# Altium PCB BOARD.PcbDoc
Units mm, origin at the board's own origin, x right, y up, seen from the top; angles counter-clockwise.
Board outline 34 x 30 mm, 2 copper layers (Top Layer, Bottom Layer), stack 0.46 mm thick; 43 components, 30 nets, 148 pads, 132 vias.
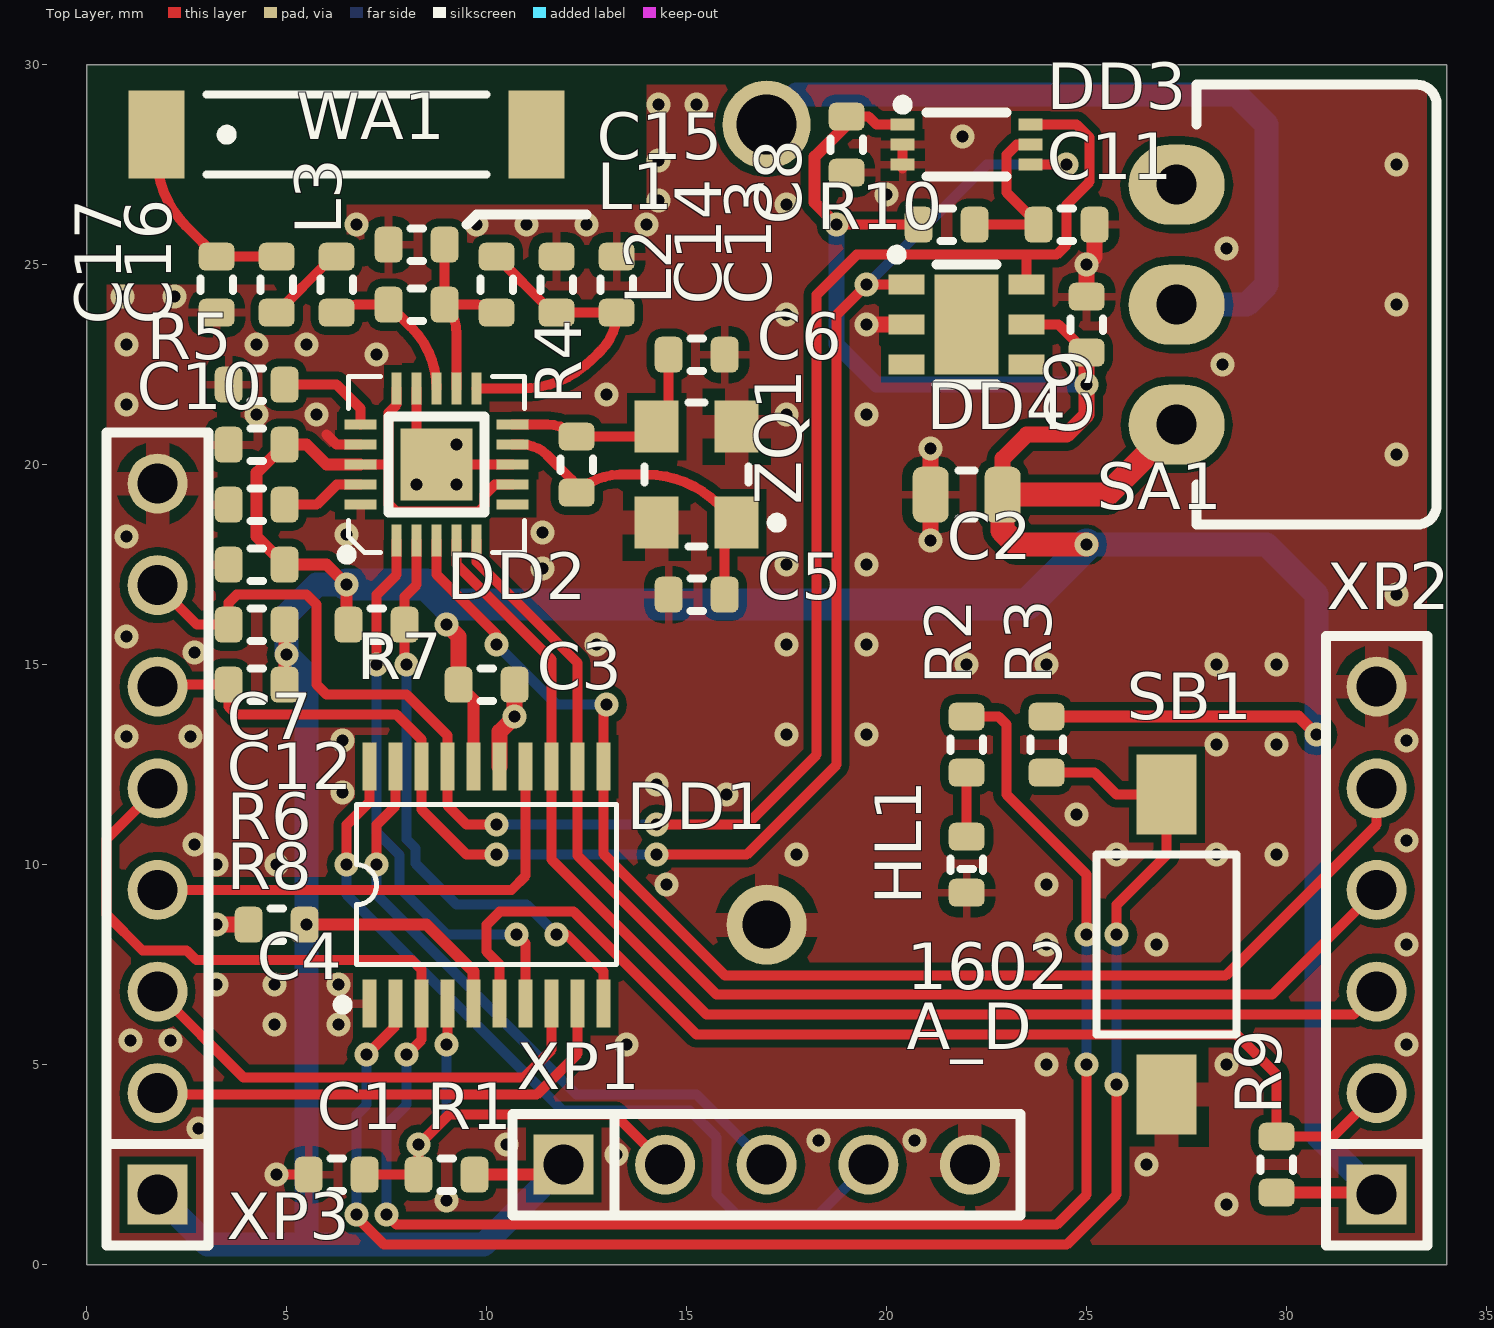
[diagram p0: Top Layer view]
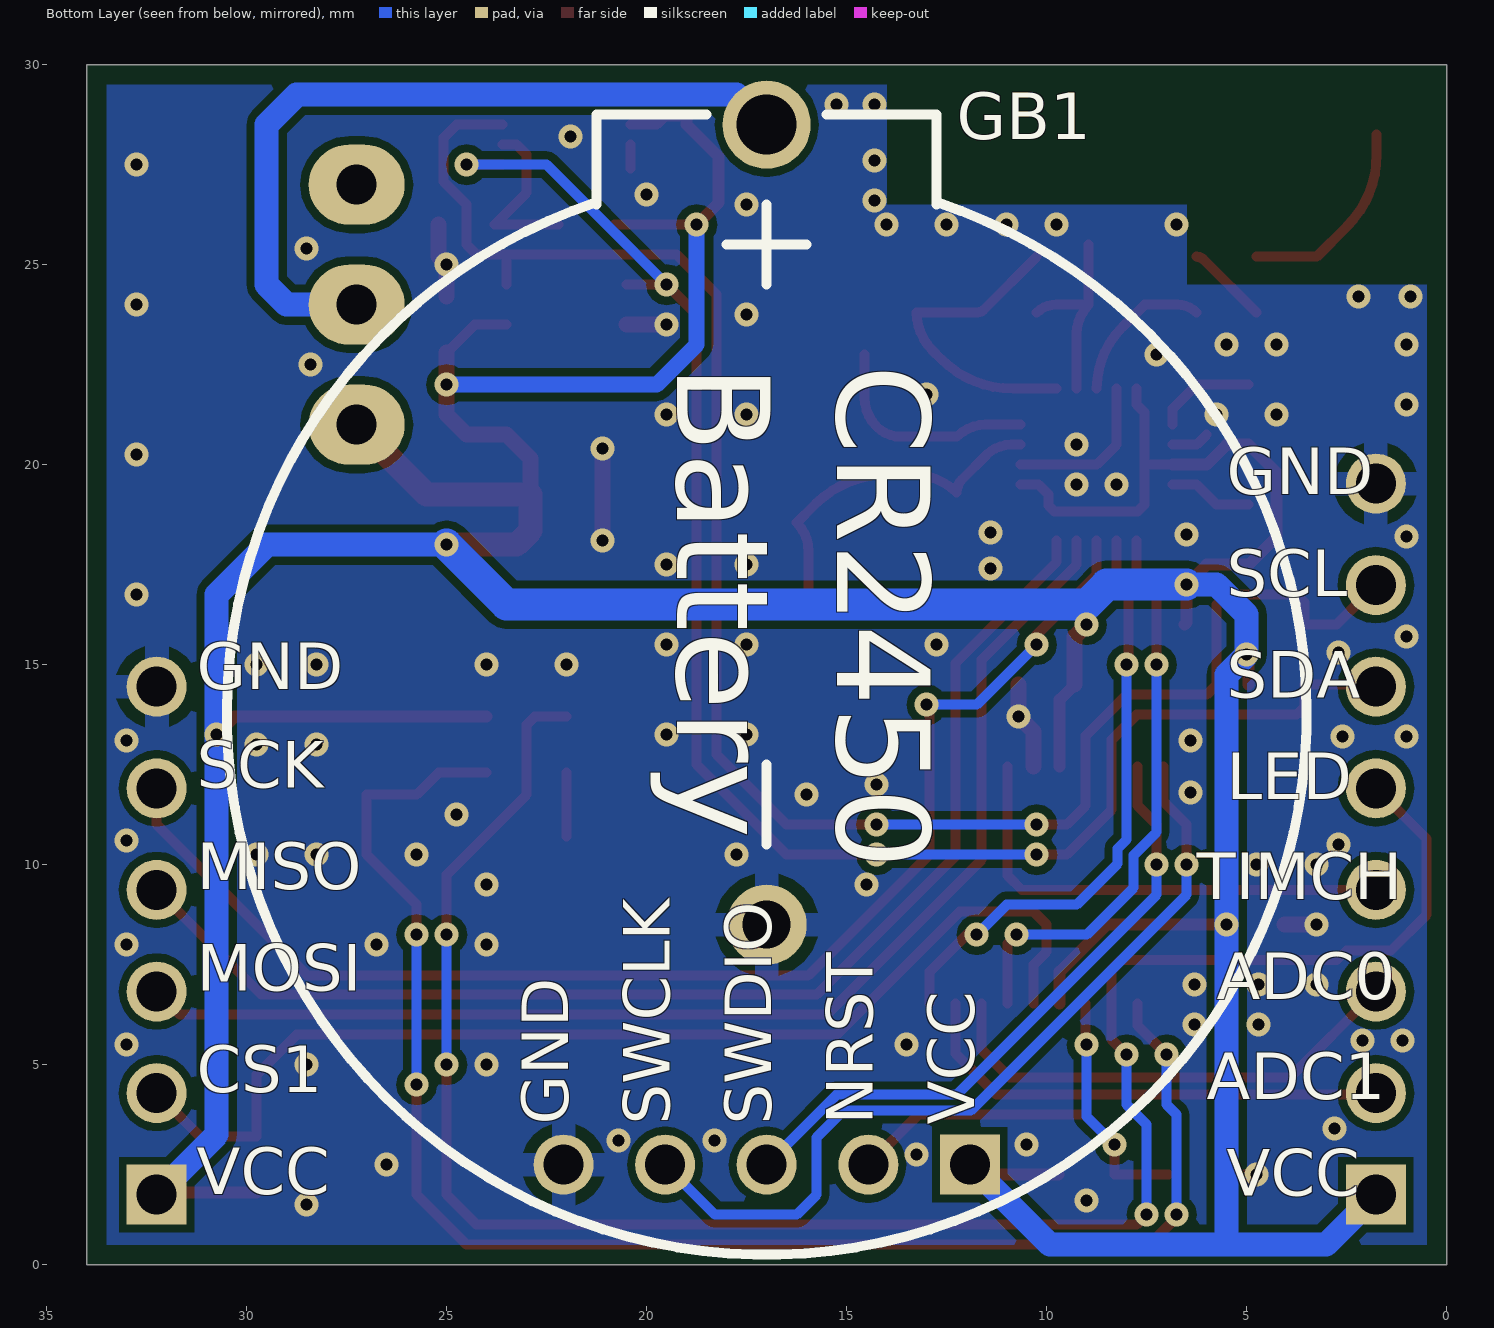
[diagram p1: Bottom Layer view, seen from below]
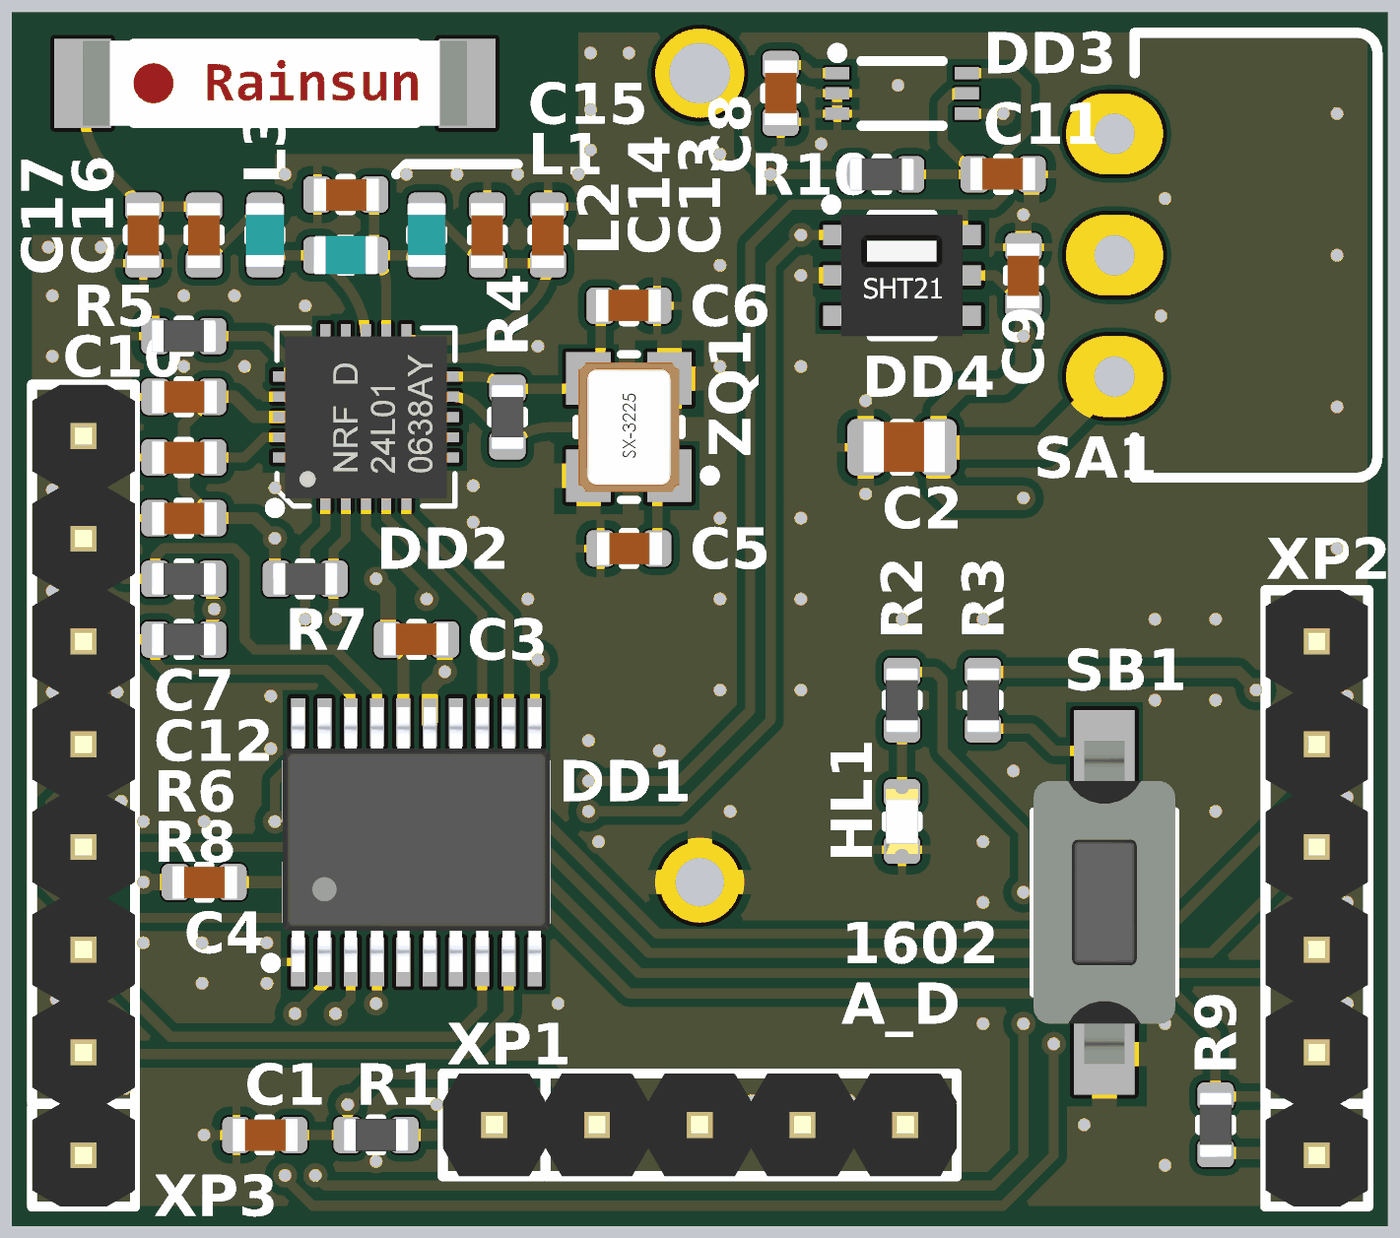
[diagram p2: 3D render of the assembled board from above, using the file's embedded part models]

## Layer stack, top to bottom
Top Solder: solder mask 0.01, Solder Resist, Dk 3.5
Top Layer: signal copper 0.03
Dielectric1: core 0.4, FR-4, Dk 4.2
Bottom Layer: signal copper 0.03
Bottom Solder: solder mask 0.01, Solder Resist, Dk 3.5

## Board outline
0,0 34,0 34,30 0,30

## Design rules (kind name [scope] priority, off if disabled: settings)
Clearance Clearance_ANT [InNetClass('ANT_Class') vs InPolygon] p1: gap=0.6 ignorepadtopadclearanceinfootprint=FALSE except(0: Arc-Hole Track-Hole SMDPad-Hole THPad-Hole Via-Hole Fill-Hole Poly-Hole Region-Hole Text-Hole)
Clearance Clearance_GND_Poly [(InNet('GND') AND InPolygon )] p2: gap=0.2 ignorepadtopadclearanceinfootprint=FALSE except(0: Arc-Hole Track-Hole SMDPad-Hole THPad-Hole Via-Hole Fill-Hole Poly-Hole Region-Hole Text-Hole)
Clearance [All] p3: gap=0.15 ignorepadtopadclearanceinfootprint=FALSE except(0: Arc-Hole Track-Hole SMDPad-Hole THPad-Hole Via-Hole Fill-Hole Poly-Hole Region-Hole Text-Hole)
ComponentClearance [All] p1 off: gap=0.25 collisioncheckmode=3 verticalgap=0.25 showdistances=FALSE
DiffPairsRouting [All] p1: maxlimit=0.4 minlimit=0.15 mostfreqgap=0.25 toplayer_minwidth=0.2 toplayer_maxwidth=0.4 toplayer_prefwidth=0.25 bottomlayer_minwidth=0.2 bottomlayer_maxwidth=0.4 bottomlayer_prefwidth=0.25 maxuncoupledlength=12
Height [All] p1: minheight=0 maxheight=25 prefheight=25
HoleSize [All] p1: absolutevalues=TRUE maxlimit=6 minlimit=0.3 maxpercent=80.000 minpercent=20.000
HoleToHoleClearance [All] p1: gap=0.25 allowstackedmicrovias=TRUE
MinimumSolderMaskSliver [All] p1 off: minsoldermaskwidth=0.254
PlaneClearance [All] p1: clearance=0.5
PlaneConnect [All] p1: planeconnectstyle=Relief reliefexpansion=0.5 reliefentries=4 reliefconductorwidth=0.25 reliefairgap=0.25
PolygonConnect PolygonConnect_XW1 [InComponent('XW1') vs IsPolygon] p1: connectstyle=Direct reliefconductorwidth=0.254 reliefentries=4 polygonreliefangle="90 Angle" airgapwidth=0.254
PolygonConnect PolygonConnect_Components [InComponent('C*') OR InComponent('R*') OR InComponent('NR*') OR InComponent('DA*') OR InComponent('DD*') OR InComponent('HL*')] p2: connectstyle=Relief reliefconductorwidth=0.2 reliefentries=4 polygonreliefangle="90 Angle" airgapwidth=0.25
PolygonConnect PolygonConnect_Connectors [All vs (InPadClass('All Pads'))] p3: connectstyle=Relief reliefconductorwidth=0.6 reliefentries=4 polygonreliefangle="90 Angle" airgapwidth=0.3
PolygonConnect PolygonConnect_Via [All] p4: connectstyle=Direct reliefconductorwidth=0.254 reliefentries=4 polygonreliefangle="90 Angle" airgapwidth=0.254
RoutingCorners [All] p1: cornerstyle=45-Degree minsetback=1.5 maxsetback=3.5
RoutingVias [All] p1: holewidth=0.6 width=1.2 viastyle="Through Hole" minholewidth=0.3 minwidth=0.6 maxholewidth=1 maxwidth=2
SMDEntry [All] p1: side=TRUE corner=TRUE anyangle=TRUE
SilkToSilkClearance [All] p1 off: silktosilkclearance=0.254
SilkToSolderMaskClearance [IsPad] p1 off: minsilkscreentomaskgap=0.254 clearancetoexposedcopper=TRUE
SolderMaskExpansion [All] p1: expansion=0.1
Width [All] p1: maxlimit=8 minlimit=0.2 preferedwidth=0.6
Width Width_TrackEnds [All] p2 off: maxlimit=0.25 minlimit=0.25 preferedwidth=0.25 checkconnectedcopper=TRUE
19 further rules are at their usual default settings.

## Components (designator, comment, footprint, x,y, rotation, side; value= is the part's Value field where it differs from the comment)
C1 "Capacitor" C0603_L 6.25,2.25 r0 top
C2 "Capacitor" C0805_L 22,19.25 r0 top
C3 "Capacitor" C0603_L 10,14.5 r180 top
C4 "Capacitor" C0603_L 4.75,8.5 r0 top
C5 "Capacitor" C0603_L 15.25,16.75 r0 top
C6 "Capacitor" C0603_L 15.25,22.75 r180 top
C7 "Capacitor" C0603_L 4.25,19 r0 top
C8 "Capacitor" C0603_L 19,28 r90 top
C9 "Capacitor" C0603_L 25,23.5 r270 top
C10 "Capacitor" C0603_L 4.25,20.5 r0 top
C11 "Capacitor" C0603_L 24.5,26 r180 top
C12 "Capacitor" C0603_L 4.25,17.5 r0 top
C13 "Capacitor" C0603_L 13.25,24.5 r270 top
C14 "Capacitor" C0603_L 11.75,24.5 r270 top
C15 "Capacitor" C0603_L 8.25,25.5 r0 top
C16 "Capacitor" C0603_L 4.75,24.5 r270 top
C17 "Capacitor" C0603_L 3.25,24.5 r270 top
DD1 "STM32F030Fx_20p" TSSOP-20W 10,9.5 r0 top
DD2 "nRF24L01" QFN-20-NRF24L01 8.75,20 r90 top
DD3 "BH1750" WSOF-6I 22,28 r270 top
DD4 "Si7021" DFN-6-PC 22,23.5 r270 top
GB1 "Text" BS-2450 17,15 r270 bottom
HL1 "Text" LD0603_L 22,10 r270 top
L1 "Coil" L0603_L 8.25,24 r0 top
L2 "Coil" L0603_L 10.25,24.5 r90 top
L3 "Coil" L0603_L 6.25,24.5 r90 top
R1 "Resistor" R0603_L 9,2.25 r0 top
R2 "Resistor" R0603_L 22,13 r90 top
R3 "Resistor" R0603_L 24,13 r90 top
R4 "Resistor" R0603_L 12.25,20 r90 top
R5 "Resistor" R0603_L 4.25,22 r0 top
R6 "Resistor" R0603_L 4.25,16 r0 top
R7 "Resistor" R0603_L 7.25,16 r180 top
R8 "Resistor" R0603_L 4.25,14.5 r0 top
R9 "Resistor" R0603_L 29.75,2.5 r270 top
R10 "Resistor" R0603_L 21.5,26 r180 top
SA1 "POWER" SS-12F21 27.25,24 r90 top
SB1 "CONF RST" DTSM-32 27,8 r180 top
WA1 "Antenna_US_1p" AN9520 6.5,28.25 r0 top
XP1 "SWD" PLS-5 17,2.5 r0 top
XP2 "SPI" PLS-6 32.25,8.1 r90 top locked
XP3 "IO" PLS-8 1.77,10.64 r90 top locked
ZQ1 "Crystal" SX-3225 15.25,19.75 r90 top

## Footprints (in the part's own frame and the unit in brackets; to place one, negate y for a bottom-side part, rotate by r counter-clockwise, add the part's x,y. Pads: shape width x height; smd on the part's side, far side on the other; paste and mask are expansions set on the pad)
AN9520 [mm] "Rainsun"
  rect 1.4x2.2 smd: 1(-4.75,0) 2(4.75,0)
  silkscreen extent -3.5,-1 3.5,1, body extent -4.75,-1.05 4.75,1.05, height 1.07
BS-2450 [mm]
  round 2.2 hole 1.5: 1(-13.5,0)
  round 2 hole 1.2: 2(6.5,0)
  silkscreen extent -13.75,-13.5 14.75,13.5, body extent -12.25,-13.5 14.75,13.5, height 9.91
C0603_L [mm] "Chip Capacitor; Body 1.6 x 0.8 mm (LxW typ)"
  rrect50% 0.7x0.9 smd mask+0.05: 1(-0.7,0) 2(0.7,0)
  silkscreen extent -0.15,-0.41 0.15,0.41, body extent -0.79,-0.41 0.81,0.39, height 0.8
C0805_L [mm] "Chip Capacitor; Body 2.0 x 1.2 mm (LxW typ)"
  rrect50% 0.9x1.4 smd mask+0.07: 1(-0.9,0) 2(0.9,0)
  silkscreen extent -0.2,-0.6 0.2,0.6, body extent -0.95,-0.62 1.05,0.64, height 1.25
DFN-6-PC [mm]
  rect 0.5x0.9 smd: 1(-1,-1.5) 2(0,-1.5) 3(1,-1.5) 4(1,1.5) 5(0,1.5) 6(-1,1.5)
  rect 2.5x1.6 smd: 7(0,0)
  silkscreen extent -1.87,-1.87 1.5,0.75, body extent -1.5,-1.52 1.5,1.5, height 1.12
DTSM-32 [mm] "1 contact, Surface, 0.05A, 250V, H=5mm"
  rect 1.5x2 smd: 1(0,3.75) 2(0,-3.75)
  silkscreen extent -1.75,-2.25 1.75,2.25, body extent -1.75,-4 1.75,4, height 5.5
L0603_L [mm] "Chip Coil; Body 1.6 x 0.8 mm (LxW typ)"
  rrect50% 0.7x0.9 smd mask+0.05: 1(-0.7,0) 2(0.7,0)
  Top Layer pour cut-out: -0.5,0.45 0.5,0.45 0.5,-0.45 -0.5,-0.45
  silkscreen extent -0.15,-0.41 0.15,0.41, body extent -0.8,-0.47 0.8,0.48, height 0.8
LD0603_L [mm] "Chip Led; Body 1.6 x 0.8 mm (LxW typ)"
  rrect50% 0.7x0.9 smd mask+0.05: 1(-0.7,0) 2(0.7,0)
  silkscreen extent -0.15,-0.41 0.15,0.41, body extent -0.8,-0.4 0.8,0.4, height 0.7
PLS-5 [mm]
  rect 1.5x1.5 hole 1: 1(-5.08,0)
  round 1.5 hole 1: 2(-2.54,0) 3(0,0) 4(2.54,0) 5(5.08,0)
  silkscreen extent -6.35,-1.27 6.35,1.27, body extent -6.35,-1.27 6.35,1.27, height 8.9
PLS-6 [mm]
  rect 1.5x1.5 hole 1: 1(-6.35,0)
  round 1.5 hole 1: 2(-3.81,0) 3(-1.27,0) 4(1.27,0) 5(3.81,0) 6(6.35,0)
  silkscreen extent -7.62,-1.27 7.62,1.27, body extent -7.62,-1.27 7.62,1.27, height 8.9
PLS-8 [mm]
  rect 1.5x1.5 hole 1: 1(-8.89,0)
  round 1.5 hole 1: 2(-6.35,0) 3(-3.81,0) 4(-1.27,0) 5(1.27,0) 6(3.81,0) 7(6.35,0) 8(8.89,0)
  silkscreen extent -10.16,-1.27 10.16,1.27, body extent -10.16,-1.27 10.16,1.27, height 8.9
QFN-20-NRF24L01 [mm] "nrf24L01 \ nrf24L01+"
  rect 0.8x0.25 smd: 1(-1.9,1) 2(-1.9,0.5) 3(-1.9,0) 4(-1.9,-0.5) 5(-1.9,-1) 11(1.9,-1) 12(1.9,-0.5) 13(1.9,0) 14(1.9,0.5) 15(1.9,1)
  rect 0.25x0.8 smd: 6(-1,-1.9) 7(-0.5,-1.9) 8(0,-1.9) 9(0.5,-1.9) 10(1,-1.9) 16(1,1.9) 17(0.5,1.9) 18(0,1.9) 19(-0.5,1.9) 20(-1,1.9)
  rect 1.8x1.8 smd: 21(0,0)
  silkscreen extent -2.37,-2.2 2.2,2.37, body extent -2.02,-2.01 2,2.01, height 1.48
R0603_L [mm] "Chip Resistor; Body 1.6 x 0.8 mm (LxW typ)"
  rrect50% 0.7x0.9 smd mask+0.05: 1(-0.7,0) 2(0.7,0)
  silkscreen extent -0.15,-0.41 0.15,0.41, body extent -0.8,-0.4 0.8,0.4, height 0.38
SS-12F21 [mm]
  oval 2x2.4 hole 1: 1(0,0) 2(-3,0) 3(3,0)
  silkscreen extent -5.5,-6.5 5.5,-0.5
SX-3225 [mm]
  rect 1.3x1.1 smd: 1(-1.2,-1) 2(1.2,-1) 3(1.2,1) 4(-1.2,1)
  silkscreen extent -1.8,-2.1 1.8,1.3, body extent -1.6,-1.25 1.6,1.25, height 0.81
TSSOP-20W [mm]
  rect 0.35x1.2 smd: 1(-2.925,-2.975) 2(-2.275,-2.975) 3(-1.625,-2.975) 4(-0.975,-2.975) 5(-0.325,-2.975) 6(0.325,-2.975) 7(0.975,-2.975) 8(1.625,-2.975) 9(2.275,-2.975) 10(2.925,-2.975) 11(2.925,2.95) 12(2.275,2.95) 13(1.625,2.95) 14(0.975,2.95) 15(0.325,2.95) 16(-0.325,2.95) 17(-0.975,2.95) 18(-1.625,2.95) 19(-2.275,2.95) 20(-2.925,2.95)
  silkscreen extent -3.72,-3.12 3.25,2, body extent -3.3,-3.22 3.3,3.33, height 1.2
WSOF-6I [mm]
  rect 0.3x0.6 smd mask+0.06: 1(-0.5,-1.6) 2(0,-1.6) 3(0.5,-1.6) 4(0.5,1.6) 5(0,1.6) 6(-0.5,1.6)
  silkscreen extent -1.12,-1.72 0.8,1, body extent -0.8,-1.3 0.8,1.3, height 0.75

## Part data
C1 C3 C4 C8 C9 C11: library part GRM188R71C104KA01D
C2: library part C0805C476M9PAC
C5 C6: library part GRM1885C1H120JA01D
C7: library part GRM188R71E223KA01D
C10: library part C0603C103J5RAC
C12: library part C0603C102J5GAC
C13: library part C0603C222J5GAC
C14: library part C0603C479K5GAC
C15 C16 C17: library part C0603C229C5GAC
DD1: library part STM32F030F4P6
DD2: library part nRF24L01+, "Single Chip 2.4GHz Transceiver"
DD3: library part BH1750FVI
DD4: library part Si7021-A20-GM1
GB1: library part BS-2450
HL1: library part BL-LS0603GC
L1: library part LQG18HN8N2J00
L2: library part LQG18HN2N7S00
L3: library part LQG18HN3N9S00
R1 R3 R6 R7 R8 R9: library part RC0603JR-0710KL
R2 R10: library part RC0603JR-071KL
R4: library part RC0603JR-071ML
R5: library part RC0603JR-0722KL
SA1: library part SS-12F21
SB1: library part DTSM-32
WA1: library part AN9520
XP1: library part PLS-5
XP2: library part PLS-6
XP3: library part PLS-8
ZQ1: library part "SX-3225 16.000MHz"

## Via types
v1: diameter 0.6, hole 0.3, Top Layer to Bottom Layer, tented both sides, 132 vias

## Nets (pads, with @x,y where several pads share a name; then routed paths per layer and width w, separated by ;. In a path a pad name is that pad's centre, name@x,y a point inside that pad or via, vN(x,y) a via of type N, cw(c..) or ccw(c..) an arc to the next point about the centre after c; other vN are vias at no path point)
ADC0: DD1.8 XP3.3 | length 12.2
  Top Layer w0.25: XP3.3 3.925,4.675 10.925,4.675 11.625,5.375 DD1.8
ADC1: DD1.9 XP3.2 | length 12.2
  Top Layer w0.25: XP3.2 1.81,4.25 11.25,4.25 12.275,5.275 DD1.9
ANT: C16.1 C17.1 WA1.1 | length 5.1
  Top Layer w0.25: WA1.1 1.75,27.752 ccw(c4.29,27.752) 2.494,25.956 C17.1 C16.1
BTN: DD1.2 R3.1 SB1.2 | length 39.3
  Top Layer w0.25: v1(6.75,1.25) 6.75,1.187 7.437,0.5 24.5,0.5 25.75,1.75 v1(25.75,4.5) ; v1(7,5.25) 7.725,5.975 DD1.2 ; R3.1 25.2,12.3 25.75,11.75 SB1.2 27,10.25 25.75,9 v1(25.75,8.25)
  Bottom Layer w0.25: v1(6.75,1.25) 6.75,3.75 7,4 v1(7,5.25) ; v1(25.75,4.5) v1(25.75,8.25)
GND: C1.1 C2.1 C3.1 C4.1 C5.1 C6.1 C7.1 C8.1 C9.1 C10.1 C11.1 C12.1 C13.1 C14.1 C15.1 C17.2 DD1.1 DD1.15 DD2.8 DD2.14 DD2.17 DD2.20 DD2.21 DD3.2 DD3.3 DD4.2 GB1.2 HL1.2 R5.1 SB1.1 XP1.5 XP2.6 XP3.8 ZQ1.2 ZQ1.4 | length 14.5
  Top Layer w0.25: v1(4.75,2.25) C1.1 ; 6,20.75 6.25,20.5 DD2.17 ; DD2.14 8.25,20.5 DD2.21 DD2.8 ; DD3.3@20.4,27.4 DD3.3 DD3.2
  Top Layer w0.4: v1(3.25,8.5) C4.1 ; DD1.15 10.325,13.325 v1(10.7,13.7) C3.1 ; v1(19.5,23.5) DD4.2 ; v1(21.1,18.1) C2.1 v1(21.1,20.4) ; C9.1 v1(25,25) 25.2,25.2 C11.1
  other v1: 28.5,1.5 9,1.6 26.5,2.5 13.25,2.75 10.5,3 18.3,3.1 20.7,3.1 2.8,3.4 24,5 28.5,5 13.5,5.5 33,5.5 1.1,5.6 2.1,5.6 4.7,6 6.3,6 3.25,7 4.7,7 6.3,7 24,8 26.75,8 33,8 14.5,9.5 24,9.5 3.25,10 4.75,10 17.75,10.25 25.75,10.25 28.25,10.25 29.75,10.25 2.7,10.5 33,10.6 24.75,11.25 16,11.75 6.4,11.8 14.25,12 28.25,13 29.75,13 6.4,13.1 33,13.1 1,13.2 2.6,13.2 17.5,13.25 19.5,13.25 22,15 24,15 28.25,15 29.75,15 2.7,15.3 12.75,15.5 17.5,15.5 19.5,15.5 1,15.7 32.75,16.75 11.4,17.4 17.5,17.5 19.5,17.5 1,18.2 6.5,18.25 11.4,18.3 8.25,19.5 9.25,19.5 32.75,20.25 9.25,20.5 4.25,21.25 5.75,21.25 17.5,21.25 19.5,21.25 1,21.5 13,21.75 28.4,22.5 7.25,22.75 1,23 4.25,23 5.5,23 17.5,23.75 32.75,24 0.9,24.2 2.2,24.2 28.5,25.4 6.75,26 9.75,26 11,26 12.5,26 14,26 17.5,26.5 14.3,26.6 20,26.75 32.75,27.5 14.3,27.6 21.9,28.2 14.3,29 15.25,29
I2C_SCL: DD1.17 DD3.6 DD4.6 R6.1 XP3.7 | length 46.4
  Top Layer w0.25: XP3.7 2.76,16 R6.1 3.55,16.55 3.75,16.75 5.5,16.75 5.75,16.5 5.75,14.5 6,14.25 8,14.25 9.025,13.225 DD1.17 9.025,11.475 9.5,11 v1(10.25,11) ; v1(14.25,11) 16.5,11 18.25,12.75 18.25,24.25 19.25,25.25 23.5,25.25 ; DD4.6 23.5,25.25 ; DD3.6 24.75,28.5 25.075,28.175 25.075,27.075 24.5,26.5 24.5,25.5 24.25,25.25 23.5,25.25
  Bottom Layer w0.25: v1(10.25,11) v1(14.25,11)
I2C_SDA: DD1.18 DD3.4 DD4.1 R8.1 XP3.6 | length 41.5
  Top Layer w0.25: XP3.6 1.82,14.5 R8.1 3.55,13.95 3.75,13.75 7.75,13.75 8.375,13.125 DD1.18 8.375,11.375 9.5,10.25 v1(10.25,10.25) ; v1(14.25,10.25) 16.5,10.25 18.75,12.5 18.75,23.75 v1(19.5,24.5) DD4.1 ; DD3.4 v1(24.5,27.5)
  Bottom Layer w0.25: v1(10.25,10.25) v1(14.25,10.25) ; v1(19.5,24.5) 22.5,27.5 v1(24.5,27.5)
LED: DD1.3 R2.2 XP3.5 | length 50.2
  Top Layer w0.25: XP3.5 0.5,10.64 0.5,8.75 1.395,7.855 2.5,7.855 2.74,7.615 8.135,7.615 8.375,7.375 DD1.3 8.375,5.625 v1(8,5.25) ; v1(7.5,1.25) 7.75,1 24.25,1 25,1.75 v1(25,5) ; R2.2 22.8,13.7 23,13.5 23,11.75 25,9.75 v1(25,8.25)
  Bottom Layer w0.25: v1(7.5,1.25) 7.5,3.5 8,4 v1(8,5.25) ; v1(25,5) v1(25,8.25)
NetC5_2: C5.2 DD2.9 R4.1 ZQ1.1 | length 8.5
  Top Layer w0.25: DD2.9 10.896,20.5 cw(c10.896,19.646) 11.5,20.25 12.109,19.641 cw(c11.767,19.3) R4.1 cw(c13.336,18.214) 13.336,19.75 13.998,19.75 cw(c13.998,17.21) 15.794,19.006 ZQ1.1 ccw(c16.974,17.826) 15.95,17.826 C5.2
NetC6_2: C6.2 DD2.10 R4.2 ZQ1.3 | length 5.6
  Top Layer w0.25: DD2.10 11.526,21 cw(c11.526,19.976) R4.2 13.646,20.7 ccw(c13.646,21.554) ZQ1.3 ccw(c13.526,21.674) 14.55,21.674 C6.2
NetC7_2: C7.2 DD2.19 | length 2.1
  Top Layer w0.25: C7.2 5.75,19 6.25,19.5 DD2.19
NetC11_2: C11.2 DD3.5 R10.1 | length 4.4
  Top Layer w0.25: R10.1 C11.2 23,26.8 23,27.75 23.25,28 DD3.5
NetC13_2: C13.2 C14.2 DD2.11 L2.2 | length 8
  Top Layer w0.25: DD2.11 10.848,21.9 ccw(c10.848,24.44) 12.644,22.644 12.861,22.861 ccw(c11.922,23.8) C13.2 C14.2 cw(c11.75,24.041) 11.579,23.871 L2.2
NetC15_2: C15.2 DD2.12 L1.2 L2.1 | length 5
  Top Layer w0.25: C15.2 L1.2 ; DD2.12 9.25,23.276 ccw(c8.226,23.276) L1.2 ; L2.1 ccw(c9.767,23.317) 9.767,24 L1.2
NetC16_2: C16.2 L3.2 | length 2.1
  Top Layer w0.25: C16.2 6.079,25.129 cw(c6.25,24.959) L3.2
NetDD2_13: DD2.13 L1.1 L3.1 | length 3.9
  Top Layer w0.25: L3.1 cw(c6.733,23.317) 6.733,24 L1.1 8.114,23.436 cw(c6.577,21.9) DD2.13
NetDD2_16: DD2.16 R5.2 | length 2.5
  Top Layer w0.25: R5.2 6.25,22 6.85,21.4 DD2.16
NetGB1_1: GB1.1 SA1.1 | length 19.6
  Bottom Layer w0.6: GB1.1 17.75,29.25 28.75,29.25 29.5,28.5 29.5,24.5 29,24 SA1.1
NetHL1_1: HL1.1 R2.1 | length 1.6
  Top Layer w0.25: HL1.1 R2.1
NRST: C1.2 DD1.4 R1.1 XP1.2 | length 12.9
  Top Layer w0.25: C1.2 R1.1 v1(8.3,3) 9.05,3.75 13.21,3.75 XP1.2 ; v1(9,5.5) 9.025,5.525 DD1.4
  Bottom Layer w0.25: v1(8.3,3) 9,3.7 v1(9,5.5)
RF_CE: DD1.7 DD2.1 | length 14.4
  Top Layer w0.25: v1(7.25,15) 7.25,16.75 7.75,17.25 DD2.1 ; v1(10.75,8.25) 10.975,8.025 DD1.7
  Bottom Layer w0.25: v1(7.25,15) 7.25,10.813 7.825,10.238 7.825,9.425 9,8.25 v1(10.75,8.25)
SPI_CS0: DD1.10 DD2.2 R7.1 | length 14.9
  Top Layer w0.25: v1(8,15) 7.95,15.05 R7.1 7.95,16.7 8.25,17 DD2.2 ; v1(11.75,8.25) 12,8.25 12.925,7.325 DD1.10
  Bottom Layer w0.25: v1(8,15) 8,10.629 8.225,10.404 8.225,10.025 9.25,9 11,9 v1(11.75,8.25)
SPI_CS1: DD1.6 R9.1 XP2.2 | length 28.2
  Top Layer w0.25: DD1.6 10.325,7.5 10,7.825 10,8.5 10.325,8.825 12.175,8.825 15.25,5.75 28.75,5.75 29.75,4.75 R9.1 31.16,3.2 XP2.2
SPI_MISO: DD1.12 DD2.5 XP2.4 | length 31.4
  Top Layer w0.25: DD2.5 9.75,17.566 12.275,15.041 DD1.12 12.275,10.225 15.75,6.75 29.63,6.75 XP2.4
SPI_MOSI: DD1.13 DD2.4 XP2.3 | length 31.4
  Top Layer w0.25: DD2.4 9.25,17.5 11.625,15.125 DD1.13 11.625,10.125 15.5,6.25 31.67,6.25 XP2.3
SPI_SCK: DD1.11 DD2.3 XP2.5 | length 33.4
  Top Layer w0.25: DD2.3 8.75,17.25 10.25,15.75 v1(10.25,15.5) ; v1(13,14) 12.925,13.925 DD1.11 12.925,10.262 15.962,7.225 28.475,7.225 32.25,11 XP2.5
  Bottom Layer w0.25: v1(10.25,15.5) 11.75,14 v1(13,14)
SWCLK: DD1.20 XP1.4 | length 21.1
  Top Layer w0.25: v1(6.5,10) 6.5,11 7.075,11.575 DD1.20
  Bottom Layer w0.25: v1(6.5,10) 6.5,9.25 11.9,3.85 15.084,3.85 15.75,3.184 15.75,1.75 16.25,1.25 18.29,1.25 XP1.4
SWDIO: DD1.19 XP1.3 | length 15.9
  Top Layer w0.25: v1(7.25,10) 7.25,11 7.725,11.475 DD1.19
  Bottom Layer w0.25: v1(7.25,10) 7.25,9.25 12.25,4.25 15.25,4.25 XP1.3
TIMCH: DD1.14 XP3.4 | length 12.1
  Top Layer w0.25: XP3.4 10.62,9.37 10.975,9.725 DD1.14
VCC: C2.2 C3.2 C4.2 C8.2 C9.2 C10.2 C12.2 DD1.5 DD1.16 DD2.7 DD2.15 DD2.18 DD3.1 DD4.5 R1.2 R3.2 R6.2 R7.2 R8.2 R9.2 R10.2 SA1.2 XP1.1 XP2.1 XP3.1 | length 140.3
  Top Layer w0.25: DD2.18 7.55,20 ; DD2.15 7.75,21.5 7.55,21.3 7.55,20 ; DD2.7 10.201,19.5 9.951,19.25 9.951,18.976 9.8,18.825 7.736,18.825 7.55,19.011 7.55,20 ; v1(18.75,26) R10.2 ; C8.2 19.55,28.7 19.75,28.5 DD3.1 ; DD4.5 24.3,23.5 C9.2
  Top Layer w0.3: R8.2 R6.2 ; v1(5.5,8.5) 8.5,8.5 9.675,7.325 DD1.5 ; R7.2 6.5,16.05 v1(6.5,17) 6,17.5 C12.2 4.25,18.2 4.25,19.8 C10.2 5.5,20.5 6,20 DD2.18 ; C3.2 9.675,14.125 DD1.16 ; R1.2 11.67,2.25 XP1.1 ; v1(18.75,26) 18.2,26.55 18.2,27.7 19,28.5 C8.2 ; R3.2 30.3,13.7 v1(30.75,13.25) ; R9.2 32.2,1.8 XP2.1
  Top Layer w0.4: v1(9,16) 9.3,15.7 C3.2 ; C2.2 22.9,20.15 23.5,20.75 24.5,20.75 25,21.25 C9.2
  Top Layer w0.6: v1(25,18) 23.25,18 22.9,18.35 C2.2 25.5,19.25 SA1.2
  Bottom Layer w0.4: v1(18.75,26) 18.75,23 19.75,22 v1(25,22)
  Bottom Layer w0.6: XP3.1 3.02,0.5 5.5,0.5 ; v1(6.5,17) 5.75,17 5,16.25 v1(5,15.25) 5.5,14.75 v1(5.5,8.5) 5.5,0.5 ; XP1.1 9.92,0.5 5.5,0.5 ; v1(25,18) 29.5,18 30.75,16.75 v1(30.75,13.25) 30.75,3.25 XP2.1
  Bottom Layer w0.8: v1(6.5,17) 8.5,17 9,16.5 23.5,16.5 v1(25,18)
pads on no net: DD2.6 DD4.3 DD4.4 DD4.7 SA1.3 WA1.2

## Polygon pours and split planes (outlines as drawn)
GND on Bottom Layer "BL-GND" (solid, remove dead copper, pour order 0): 33.5,0.5 0.5,0.5 0.5,29.5 33.5,29.5
GND on Top Layer "TL-GND" (solid, remove dead copper, pour order 2): 33.5,0.5 0.5,0.5 0.5,29.5 33.5,29.5

## Other copper
Top Layer:
  pour cut-out: 0,24.5 6.5,24.5 6.5,26.5 14,26.5 14,30 0,30
Bottom Layer:
  pour cut-out: 0,24.5 6.5,24.5 6.5,26.5 14,26.5 14,30 0,30

## Silkscreen, mask and mechanical layers (free items; w line width, h text height)
Top Overlay:
  lines w0.25: 9.5,26 9.75,26.25 12.5,26.25
  text "1602" at 20.5,6.5 h2
  text "A_D" at 20.5,5 h2
Bottom Overlay:
  text "GND" at 5.5,18.87 h2
  text "SCL" at 5.5,16.33 h2
  text "GND" at 31.25,14 h2
  text "SDA" at 5.5,13.79 h2
  text "SCK" at 31.25,11.54 h2
  text "LED" at 5.5,11.25 h2
  text "MISO" at 31.25,9 h2
  text "TIMCH" at 6.25,8.75 h2
  text "MOSI" at 31.25,6.46 h2
  text "ADC0" at 5.75,6.25 h2
  text "CS1" at 31.25,3.92 h2
  text "ADC1" at 6,3.75 h2
  text "VCC" at 11.42,3.5 h2 r270
  text "NRST" at 13.96,3.5 h2 r270
  text "SWDIO" at 16.5,3.5 h2 r270
  text "SWCLK" at 19.04,3.5 h2 r270
  text "GND" at 21.58,3.5 h2 r270
  text "VCC" at 31.25,1.38 h2
  text "VCC" at 5.5,1.34 h2
1 - Board Outline:
  the board outline again, w0.1
11 - Dementions (Top):
  lines w0.254: -3.008,1.524 -2.5,0 ; -3.008,28.476 -2.5,30 ; -2.754,0 -2.246,0 ; -2.754,30 -2.246,30 ; -2.5,9.896 -2.5,0 ; -2.5,20.104 -2.5,30 ; -1.992,1.524 -2.5,0 ; -1.992,28.476 -2.5,30 ; 0,-2.754 0,-2.246 ; 1.524,-3.008 0,-2.5 ; 1.524,-1.992 0,-2.5 ; 11.896,-2.5 0,-2.5 ; 22.104,-2.5 34,-2.5 ; 32.476,-3.008 34,-2.5 ; 32.476,-1.992 34,-2.5 ; 34,-2.754 34,-2.246
  text "30 (mm)" at -1.586,10.15 h1.52 r90
  text "34 (mm)" at 12.15,-3.414 h1.52

## Text inside footprints (layer, text, board x,y; h text height)
GB1: Bottom Overlay "CR2450" at 16,22.5 h4 r90; Bottom Overlay "Battery" at 20,22.5 h4 r90